# EAGLE board Team1_Wetterstation_v2_board2 (EAGLE 9.5.0)
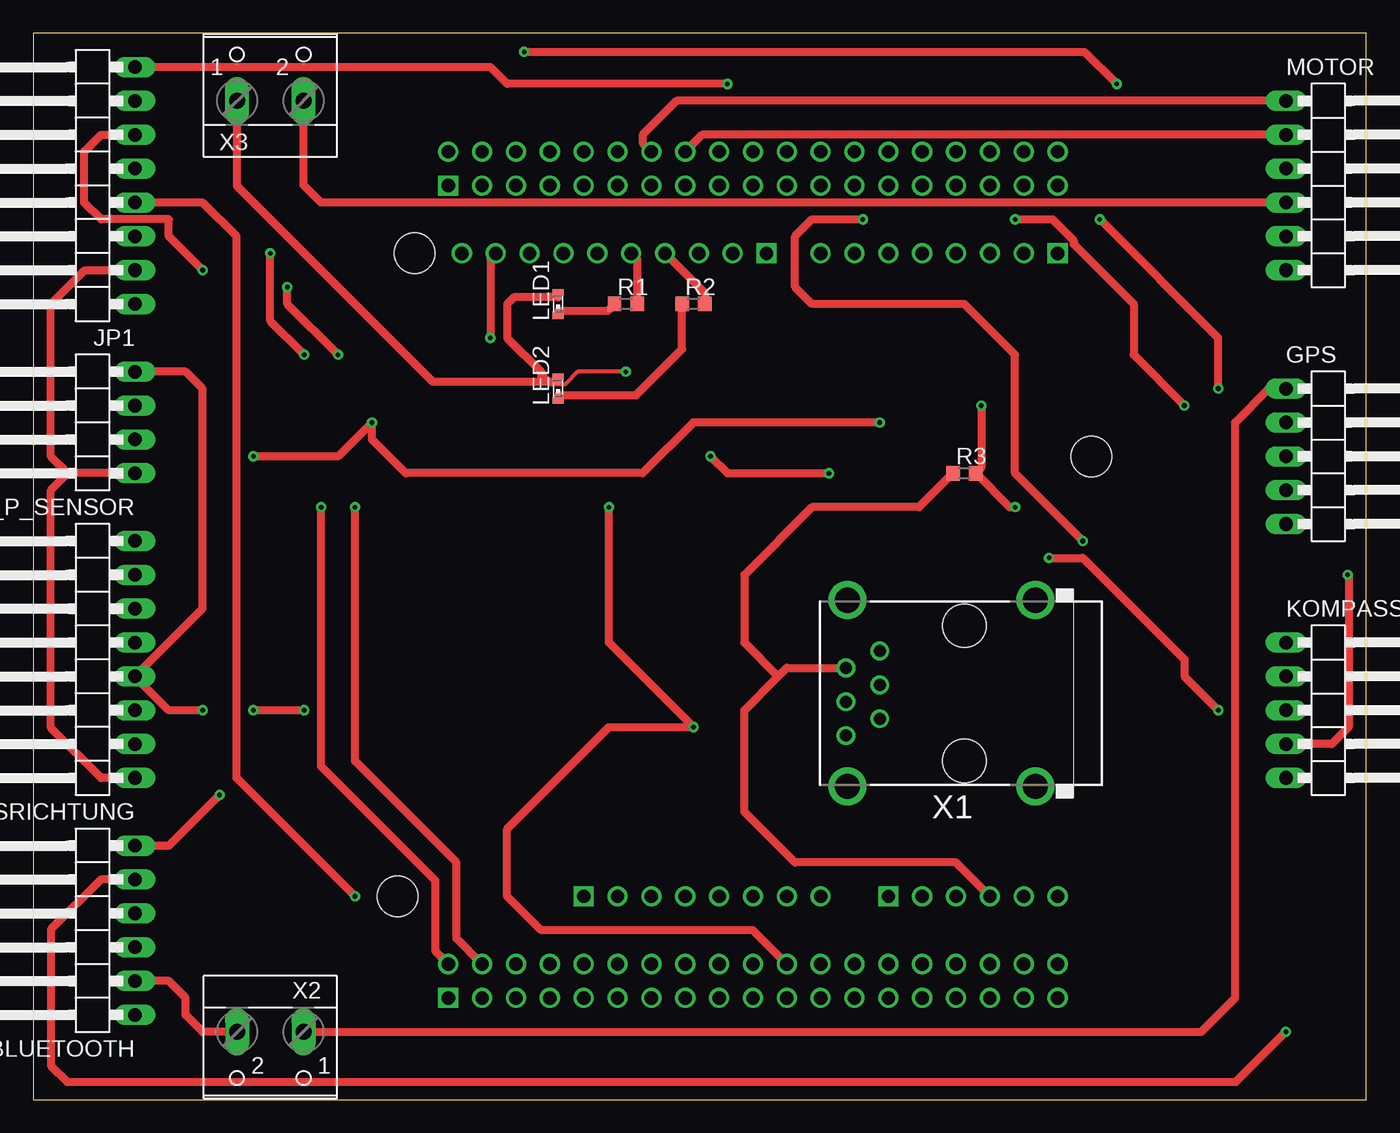
[diagram p0: board, top side]
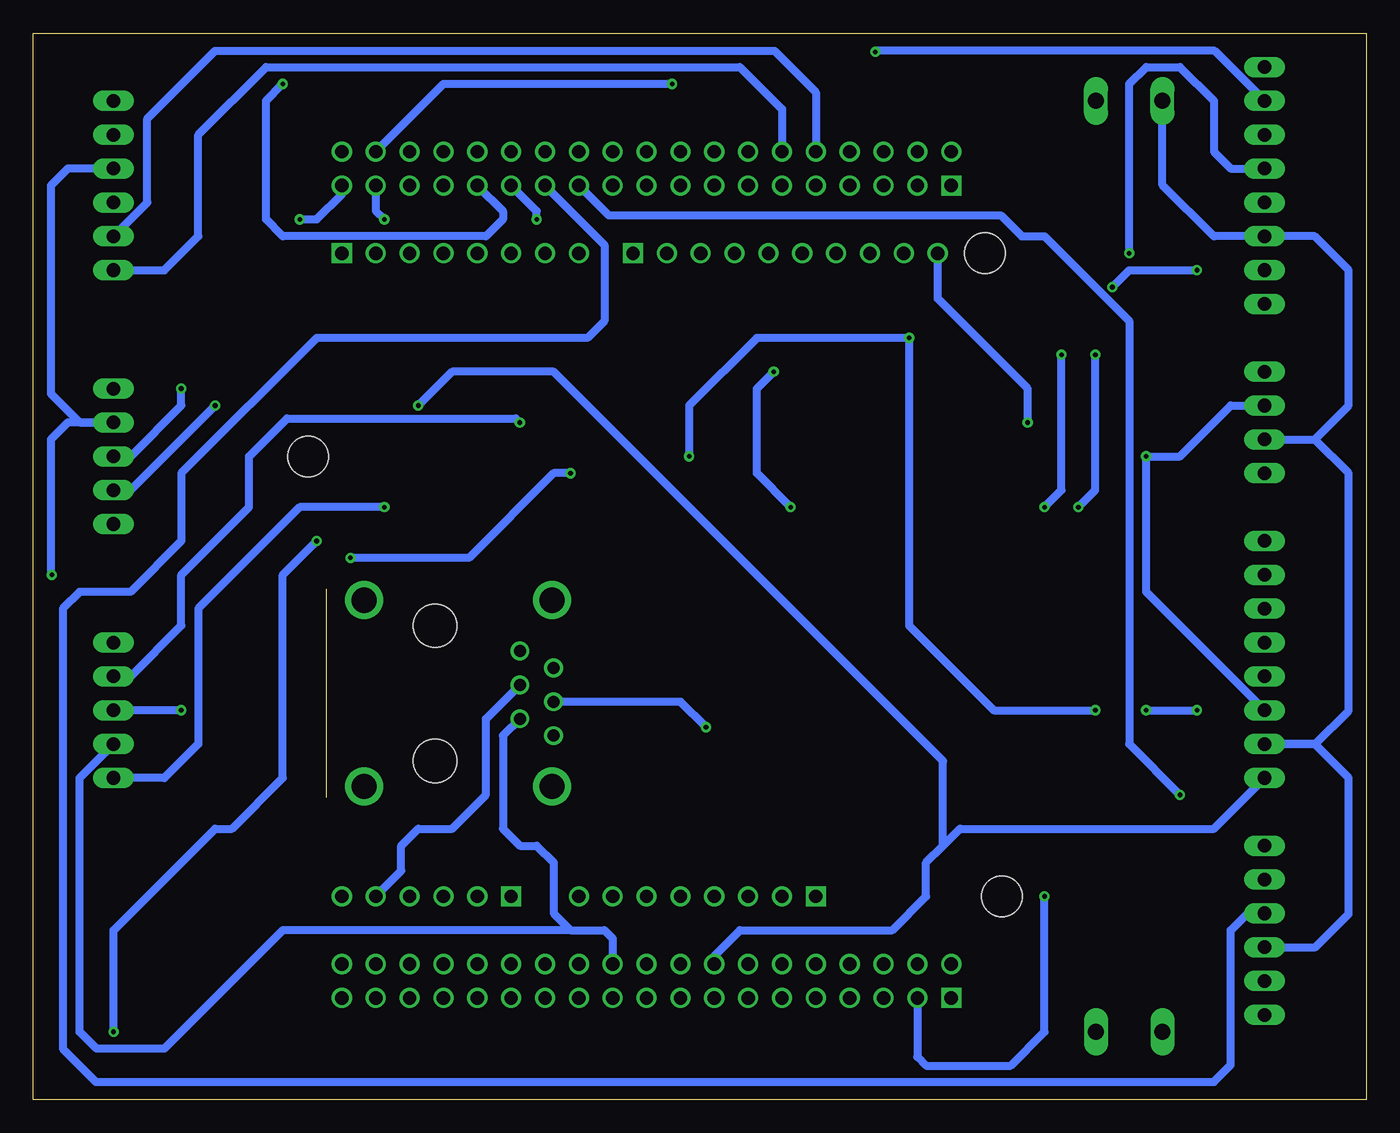
[diagram p1: board, bottom side, seen from below]

Size 100 x 80 mm. Coordinates in mm from the lower left corner, seen from the top.
Outline: 0,0 100,0 100,80 0,80 0,0
Copper layers (1*16): Top 0.035mm / dielectric 1.5mm / Bottom 0.035mm
Design rules "default": minimum track width 6mil, minimum drill 0.35mm, track to track 6mil, track to pad 6mil, pad to pad 6mil, via to via 6mil, smd to smd 6mil, copper to edge 40mil, drill to drill 6mil, minimum pad ring 10mil, minimum via ring 8mil, stop-mask expansion 4mil, vias tented up to drill 0mil, thermal gap 10mil

## Footprints (pad centres in the part's own frame; a part is rotated, then mirrored left to right if it is on the bottom)
1X08/90 = drill 1.016 long: 1 -8.89,-3.81; 2 -6.35,-3.81; 3 -3.81,-3.81; 4 -1.27,-3.81; 5 1.27,-3.81; 6 3.81,-3.81; 7 6.35,-3.81; 8 8.89,-3.81
1X06/90 = drill 1.016 long: 1 -6.35,-3.81; 2 -3.81,-3.81; 3 -1.27,-3.81; 4 1.27,-3.81; 5 3.81,-3.81; 6 6.35,-3.81
1X05/90 = drill 1.016 long: 1 -5.08,-3.81; 2 -2.54,-3.81; 3 0,-3.81; 4 2.54,-3.81; 5 5.08,-3.81
SMARTLED-TTW = smd 0.8 x 0.5: A 0,-0.875; C 0,0.875 | smd 0.35 x 0.35: A@1 0,-0.5; C@1 0,0.5
R0603 = smd 1 x 1.1: 1 -0.85,0; 2 0.85,0
1X04/90 = drill 1.016 long: 1 -3.81,-3.81; 2 -1.27,-3.81; 3 1.27,-3.81; 4 3.81,-3.81
MODULE_NUCLEO-L053R8 = drill 1 square: CN1-1 -31.75,9.51; CN4-1 -24.13,-23.51; CN5-1 -24.13,-0.65; CN7-1 24.13,-36.21; CN8-1 24.13,-14.37; CN9-1 29.21,9.51 | drill 1: CN1-2 -29.21,9.51; CN1-3 -31.75,6.97; CN1-4 -29.21,6.97; CN1-5 -31.75,4.43; CN1-6 -29.21,4.43; CN1-7 -31.75,1.89; CN1-8 -29.21,1.89; CN1-9 -31.75,-0.65; CN1-10 -29.21,-0.65; CN1-11 -31.75,-3.19; CN1-12 -29.21,-3.19; CN1-13 -31.75,-5.73; CN1-14 -29.21,-5.73; CN1-15 -31.75,-8.27; CN1-16 -29.21,-8.27; CN1-17 -31.75,-10.81; CN1-18 -29.21,-10.81; CN1-19 -31.75,-13.35; CN1-20 -29.21,-13.35; CN1-21 -31.75,-15.89; CN1-22 -29.21,-15.89; CN1-23 -31.75,-18.43; CN1-24 -29.21,-18.43; CN1-25 -31.75,-20.97; CN1-26 -29.21,-20.97; CN1-27 -31.75,-23.51; CN1-28 -29.21,-23.51; CN1-29 -31.75,-26.05; CN1-30 -29.21,-26.05; CN1-31 -31.75,-28.59; CN1-32 -29.21,-28.59; CN1-33 -31.75,-31.13; CN1-34 -29.21,-31.13; CN1-35 -31.75,-33.67; CN1-36 -29.21,-33.67; CN1-37 -31.75,-36.21; CN1-38 -29.21,-36.21; CN4-2 -24.13,-26.05; CN4-3 -24.13,-28.59; CN4-4 -24.13,-31.13; CN4-5 -24.13,-33.67; CN4-6 -24.13,-36.21; CN5-2 -24.13,-3.19; CN5-3 -24.13,-5.73; CN5-4 -24.13,-8.27; CN5-5 -24.13,-10.81; CN5-6 -24.13,-13.35; CN5-7 -24.13,-15.89; CN5-8 -24.13,-18.43; CN7-2 24.13,-33.67; CN7-3 24.13,-31.13; CN7-4 24.13,-28.59; CN7-5 24.13,-26.05; CN7-6 24.13,-23.51; CN7-7 24.13,-20.97; CN7-8 24.13,-18.43; CN8-2 24.13,-11.83; CN8-3 24.13,-9.29; CN8-4 24.13,-6.75; CN8-5 24.13,-4.21; CN8-6 24.13,-1.67; CN8-7 24.13,0.87; CN8-8 24.13,3.41; CN8-9 24.13,5.95; CN8-10 24.13,8.49; CN9-2 31.75,9.51; CN9-3 29.21,6.97; CN9-4 31.75,6.97; CN9-5 29.21,4.43; CN9-6 31.75,4.43; CN9-7 29.21,1.89; CN9-8 31.75,1.89; CN9-9 29.21,-0.65; CN9-10 31.75,-0.65; CN9-11 29.21,-3.19; CN9-12 31.75,-3.19; CN9-13 29.21,-5.73; CN9-14 31.75,-5.73; CN9-15 29.21,-8.27; CN9-16 31.75,-8.27; CN9-17 29.21,-10.81; CN9-18 31.75,-10.81; CN9-19 29.21,-13.35; CN9-20 31.75,-13.35; CN9-21 29.21,-15.89; CN9-22 31.75,-15.89; CN9-23 29.21,-18.43; CN9-24 31.75,-18.43; CN9-25 29.21,-20.97; CN9-26 31.75,-20.97; CN9-27 29.21,-23.51; CN9-28 31.75,-23.51; CN9-29 29.21,-26.05; CN9-30 31.75,-26.05; CN9-31 29.21,-28.59; CN9-32 31.75,-28.59; CN9-33 29.21,-31.13; CN9-34 31.75,-31.13; CN9-35 29.21,-33.67; CN9-36 31.75,-33.67; CN9-37 29.21,-36.21; CN9-38 31.75,-36.21 | hole 3.05: 24.13,12.05; -24.13,13.32; 8.89,-38.75
RJ11-SHIELD2 = drill 0.9 pad 1.4: 1 -3.175,8.89; 2 -1.905,6.35; 3 -0.635,8.89; 4 0.635,6.35; 5 1.905,8.89; 6 3.175,6.35 | drill 1.9 pad 2.5: S1 -6.985,-5.334; S2 6.985,-5.334; S3 -6.985,8.763; S4 6.985,8.763 | hole 3.251: -5.08,0; 5.08,0
W237-102 = drill 1.194 long: 1 -2.5,-1.27; 2 2.5,-1.27

## Placement (x,y rotation side)
AUSRICHTUNG  [1X08/90]  3.81,33.02 90 top
BLUETOOTH  [1X06/90]  3.81,12.7 90 top
GPS  [1X05/90]  97.79,48.26 270 top
JP1  [1X08/90]  3.81,68.58 90 top
KOMPASS  [1X05/90]  97.79,29.21 270 top
LED1  [SMARTLED-TTW]  39.37,59.69 0 top
LED2  [SMARTLED-TTW]  39.37,53.34 0 top
MOTOR  [1X06/90]  97.79,68.58 270 top
R1  [R0603]  44.45,59.69 0 top
R2  [R0603]  49.53,59.69 0 top
R3  [R0603]  69.85,46.99 0 top
T_H_P_SENSOR  [1X04/90]  3.81,50.8 90 top
U$1  NUCLEO-8L152R8  [MODULE_NUCLEO-L053R8]  40.64,39.37 90 top
X1  RJ11-2LC2-B  [RJ11-SHIELD2]  69.85,30.48 90 top
X2  [W237-102]  17.78,3.81 180 top
X3  [W237-102]  17.78,76.2 0 top

## Library data of the parts
AUSRICHTUNG BLUETOOTH GPS JP1 KOMPASS MOTOR T_H_P_SENSOR = pinhead
LED1 LED2 = led
R1-R3 = rcl; SPICEPREFIX: R
U$1 = nucleo
X1 = con-tycoelectronics; OC_FARNELL: unknown; OC_NEWARK: unknown
X2 X3 = con-wago-500; MPN: 237-102; OC_FARNELL: unknown; OC_NEWARK: 70K9898

## Nets
3V3: AUSRICHTUNG.1 JP1.2 KOMPASS.5 R3.2 T_H_P_SENSOR.1 U$1.CN1-16
5VBT: BLUETOOTH.2 X2.2
5VGPS: GPS.1 X2.1
12VREG: MOTOR.4 X3.2
A_1A: MOTOR.5 U$1.CN9-10
A_1B: MOTOR.6 U$1.CN9-12
ADC1_WV_IN16: R3.1 U$1.CN4-4 X1.5
B_1A: MOTOR.1 U$1.CN9-14
B_1B: MOTOR.2 U$1.CN9-16
BT_STATUS: BLUETOOTH.6 U$1.CN9-23
GND: AUSRICHTUNG.2 BLUETOOTH.3 GPS.2 JP1.3 KOMPASS.4 LED1.C@1 LED2.C@1 MOTOR.3 T_H_P_SENSOR.2 U$1.CN1-22 X1.2 X1.3 X3.1
GPIO_SD_CS: JP1.7 U$1.CN9-29
GPIO_SD_DET: JP1.8 U$1.CN9-36
N$1: R1.2 U$1.CN8-5
N$2: LED1.A@1 R1.1
N$3: R2.2 U$1.CN8-4
N$4: LED2.A@1 R2.1
SCL: AUSRICHTUNG.3 KOMPASS.2 T_H_P_SENSOR.3 U$1.CN8-10
SDA: AUSRICHTUNG.4 KOMPASS.3 T_H_P_SENSOR.4 U$1.CN8-9
SPI2_MISO: JP1.5 U$1.CN1-2
SPI2_MOSI: JP1.6 U$1.CN1-4
SPI2_SCK: JP1.4 U$1.CN1-3
TIM3_ANEM_CH1: U$1.CN4-5 X1.4
USART1_BT_RX: BLUETOOTH.5 U$1.CN9-27
USART1_BT_TX: BLUETOOTH.4 U$1.CN9-25
USART_GPS_RX: GPS.3 U$1.CN9-37
USART_GPS_TX: GPS.4 U$1.CN9-35

## Tracks (layer width: path | path; a pad name or v marks a point on that pad's centre or on a via)
3V3  (via drill 0.35)
  Top 0.61: v71.12,52.07 71.12,47.41 R3.2 73.24,44.45 v73.66,44.45 | AUSRICHTUNG.1 5.08,24.13 1.32,27.89 1.32,45.72 2.59,46.99 | T_H_P_SENSOR.1 2.59,46.99 | 2.59,46.99 1.32,48.26 1.32,59.69 3.86,62.23 JP1.2
  Bottom 0.61: U$1.CN1-16 48.91,10.78 46.99,12.7 35.56,12.7 33.02,15.24 33.02,17.78 31.75,19.05 | 31.75,19.05 30.48,20.32 11.43,20.32 AUSRICHTUNG.1 | 31.75,19.05 31.75,25.4 60.96,54.61 68.58,54.61 v71.12,52.07 | v73.66,44.45 80.01,44.45 87.63,36.83 87.63,26.67 90.17,24.13 KOMPASS.5
5VBT
  Top 0.61: X2.2 12.7,5.08 11.43,6.35 11.43,7.62 10.16,8.89 BLUETOOTH.2
5VGPS
  Top 0.61: X2.1 87.63,5.08 90.17,7.62 90.17,50.8 92.71,53.34 GPS.1
12VREG
  Top 0.61: MOTOR.4 21.59,67.31 20.28,68.62 X3.2
A_1A
  Bottom 0.61: MOTOR.5 91.44,67.31 91.44,73.6 86.36,78.68 44.39,78.68 41.29,75.58 U$1.CN9-10
A_1B
  Bottom 0.61: MOTOR.6 90.17,62.23 87.63,64.77 87.63,72.39 82.55,77.47 46.99,77.47 43.83,74.31 U$1.CN9-12
ADC1_WV_IN16
  Top 0.61: U$1.CN4-4 69.23,17.78 57.15,17.78 53.34,21.59 53.34,29.21 55.88,31.75 | X1.5 56.52,32.38 55.88,31.75 | R3.1 66.46,44.45 58.42,44.45 53.34,39.37 53.34,34.29 55.88,31.75
B_1A
  Top 0.61: MOTOR.1 48.26,74.93 45.72,72.39 45.72,71.77 U$1.CN9-14
B_1B
  Top 0.61: MOTOR.2 50.18,72.39 U$1.CN9-16
BT_STATUS  (via drill 0.35)
  Top 0.61: v13.97,22.86 10.16,19.05 BLUETOOTH.6
  Bottom 0.61: U$1.CN9-23 56.84,66.35 27.41,66.35 25.84,64.77 24.13,64.77 17.78,58.42 17.78,26.67 v13.97,22.86
GND  (via drill 0.35)
  Top 0.305: v44.45,54.61 40.85,54.61 39.9,53.66 38.84,53.66 38.66,53.84 38.66,54.05 38.1,54.61
  Top 0.61: LED2.C@1 38.1,53.84 | 38.1,53.84 29.98,53.84 15.28,68.54 X3.1 | LED1.C@1 36.06,60.19 35.56,59.69 35.56,57.15 38.1,54.61 38.1,53.84 | v98.61,39.37 98.68,39.3 98.68,27.94 97.41,26.67 KOMPASS.4 | U$1.CN1-22 53.99,12.7 38.1,12.7 35.56,15.24 35.56,20.32 43.18,27.94 v49.53,27.94 43.18,34.29 v43.18,44.45
  Bottom 0.61: X1.2 64.77,27.3 64.77,20.32 63.5,19.05 62.23,19.05 60.96,17.78 60.96,13.97 59.69,12.7 | 59.69,12.7 57.15,12.7 56.53,12.08 U$1.CN1-22 | BLUETOOTH.3 3.81,11.43 1.32,13.92 1.32,24.13 3.86,26.67 AUSRICHTUNG.2 3.81,26.67 1.32,29.16 1.32,46.99 3.86,49.53 | T_H_P_SENSOR.2 3.86,49.53 | 3.86,49.53 1.32,52.07 1.32,62.23 3.86,64.77 JP1.3 11.43,64.77 15.28,68.62 X3.1 | MOTOR.3 97.41,69.85 98.68,68.58 98.68,52.96 96.52,50.8 GPS.2 97.41,50.8 98.68,49.53 98.68,39.37 v98.61,39.37 | 59.69,12.7 81.28,12.7 90.17,3.81 95.25,3.81 96.52,5.08 96.52,24.13 KOMPASS.4 | v49.53,27.94 51.44,29.84 X1.3 | v43.18,44.45 45.72,46.99 45.72,53.34 v44.45,54.61
GPIO_SD_CS  (via drill 0.35)
  Top 0.61: v36.83,78.61 78.87,78.61 v81.28,76.2
  Bottom 0.61: JP1.7 11.37,78.68 36.83,78.68 v36.83,78.61 | U$1.CN9-29 64.77,66.66 64.77,66.04 66.04,64.77 81.28,64.77 82.55,66.04 82.55,74.93 v81.28,76.2
GPIO_SD_DET  (via drill 0.35)
  Top 0.61: v52.07,76.2 35.56,76.2 34.29,77.47 JP1.8
  Bottom 0.61: U$1.CN9-36 69.23,76.2 v52.07,76.2
N$1
  Top 0.61: U$1.CN8-5 45.3,63.05 R1.2
N$2
  Top 0.61: LED1.A@1 43.1,59.19 R1.1
N$3
  Top 0.61: U$1.CN8-4 50.38,60.51 R2.2
N$4
  Top 0.61: LED2.A@1 45.22,52.84 48.68,56.3 R2.1
SCL  (via drill 0.35)
  Top 0.61: v63.5,50.8 49.53,50.8 45.72,46.99 27.94,46.99 25.4,49.53 v25.4,50.8 22.86,48.26 v16.51,48.26
  Bottom 0.61: KOMPASS.2 92.71,31.75 88.9,35.56 88.9,39.37 83.82,44.45 83.82,48.26 80.97,51.11 63.81,51.11 v63.5,50.8 | v25.4,50.8 25.4,53.34 32.15,60.09 U$1.CN8-10 | T_H_P_SENSOR.3 10.16,52.07 13.97,48.26 v16.51,48.26 16.51,38.1 AUSRICHTUNG.3
SDA  (via drill 0.35)
  Top 0.61: T_H_P_SENSOR.4 11.43,54.61 12.7,53.34 12.7,36.83 AUSRICHTUNG.4 10.16,29.21 v12.7,29.21 | U$1.CN8-9 34.29,63.1 v34.29,57.15 | v20.32,29.21 v16.51,29.21 | v50.8,48.26 52.07,46.99 v59.69,46.99 | v76.2,40.64 78.74,40.64 86.36,33.02 86.36,31.75 v88.9,29.21
  Bottom 0.61: v20.32,29.21 27.94,29.21 34.29,35.56 v34.29,57.15 45.72,57.15 50.8,52.07 v50.8,48.26 | v16.51,29.21 v12.7,29.21 | v59.69,46.99 60.96,46.99 67.31,40.64 v76.2,40.64 | v88.9,29.21 KOMPASS.3
SPI2_MISO  (via drill 0.35)
  Top 0.61: U$1.CN1-2 30.17,11.12 30.17,16.42 21.59,25 v21.59,44.45 | v20.32,55.88 17.78,58.42 v17.78,63.5
  Bottom 0.61: v21.59,44.45 20.32,45.72 v20.32,55.88 | v17.78,63.5 17.78,76.2 16.51,77.47 13.97,77.47 11.43,74.93 11.43,71.12 10.16,69.85 JP1.5
SPI2_MOSI  (via drill 0.35)
  Top 0.61: U$1.CN1-4 31.75,12.08 31.75,17.78 24.13,25.4 v24.13,44.45 | v22.86,55.88 19.05,59.69 v19.05,60.96 | v12.7,62.23 10.16,64.77 10.16,66.04 5.08,66.04 3.81,67.31 3.81,71.12 5.08,72.39 JP1.6
  Bottom 0.61: v24.13,44.45 22.86,45.72 v22.86,55.88 | v19.05,60.96 17.78,62.23 v12.7,62.23
SPI2_SCK  (via drill 0.35)
  Top 0.61: v24.13,15.24 15.24,24.13 15.24,64.77 12.7,67.31 JP1.4
  Bottom 0.61: U$1.CN1-3 33.67,3.19 33.02,2.54 26.67,2.54 24.13,5.08 v24.13,15.24
TIM3_ANEM_CH1
  Bottom 0.61: U$1.CN4-5 72.39,17.16 72.39,19.05 71.12,20.32 68.58,20.32 66.04,22.86 66.04,28.57 X1.4
USART1_BT_RX  (via drill 0.35)
  Top 0.61: BLUETOOTH.5 5.08,16.51 1.32,12.75 1.32,2.54 2.54,1.32 90.22,1.32 v93.98,5.08 | v62.23,66.04 58.42,66.04 57.15,64.77 57.15,60.96 58.42,59.69 69.85,59.69 73.66,55.88 73.66,46.99 v78.74,41.91
  Bottom 0.61: v93.98,5.08 93.98,12.7 86.36,20.32 85.09,20.32 81.28,24.13 81.28,39.37 v78.74,41.91 | v62.23,66.04 62.23,66.66 U$1.CN9-27
USART1_BT_TX
  Bottom 0.61: U$1.CN9-25 57.15,64.12 57.15,58.42 58.42,57.15 78.74,57.15 88.9,46.99 88.9,41.91 92.71,38.1 96.52,38.1 97.79,36.83 97.79,3.81 95.3,1.32 11.43,1.32 10.16,2.59 10.16,12.7 8.89,13.97 BLUETOOTH.4
USART_GPS_RX  (via drill 0.35)
  Top 0.61: v88.9,53.34 88.9,57.15 v80.01,66.04
  Bottom 0.61: GPS.3 92.71,48.26 88.9,52.07 v88.9,53.34 | v80.01,66.04 78.74,66.04 76.85,67.93 U$1.CN9-37
USART_GPS_TX  (via drill 0.35)
  Top 0.61: v73.66,66.04 76.47,66.04 78.06,64.44 78.06,64.18 82.55,59.69 82.55,55.88 v86.36,52.07
  Bottom 0.61: U$1.CN9-35 74.31,66.69 v73.66,66.04 | GPS.4 92.71,45.72 v86.36,52.07